# Altium PCB PCB.PcbDoc
Units mm, origin at the board's own origin, x right, y up, seen from the top; angles counter-clockwise.
Board outline 70 x 20.02 mm, 2 copper layers (Top Layer, Bottom Layer), stack 1.569 mm thick; 23 components, 16 nets, 70 pads, 25 vias.
Unrouted connection lines stored in the file: 1.
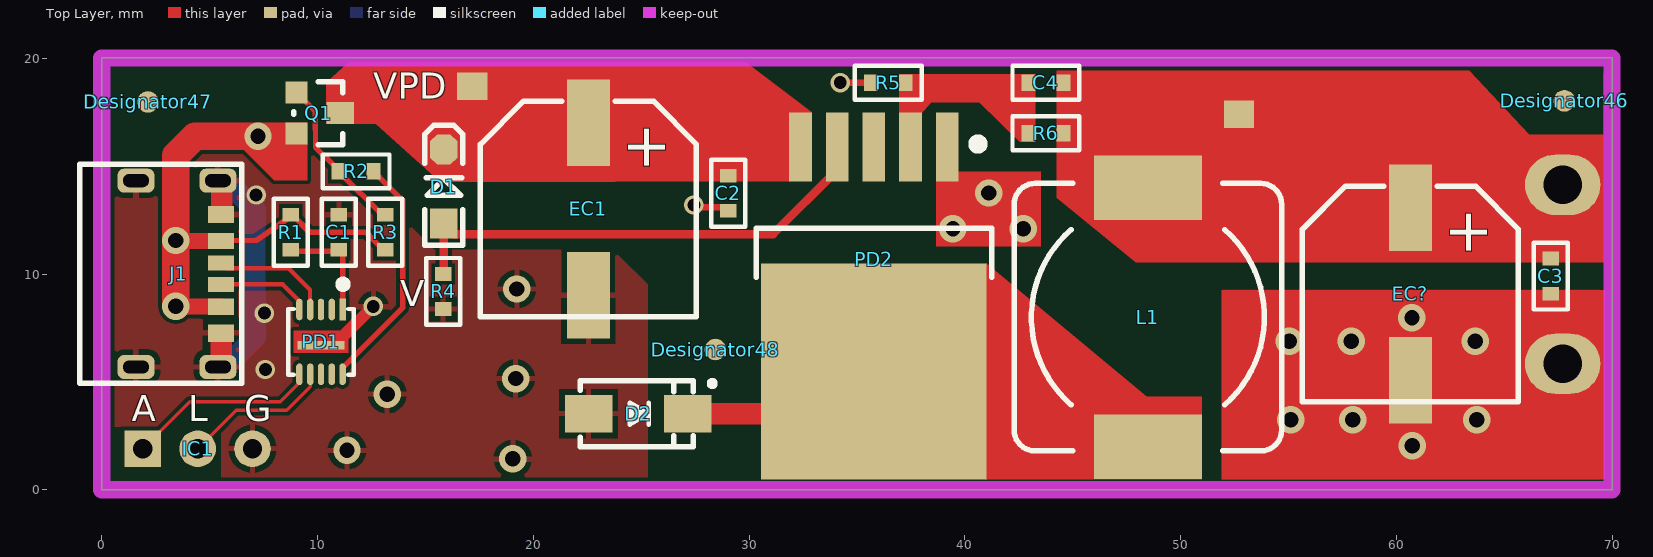
[diagram p0: Top Layer view]
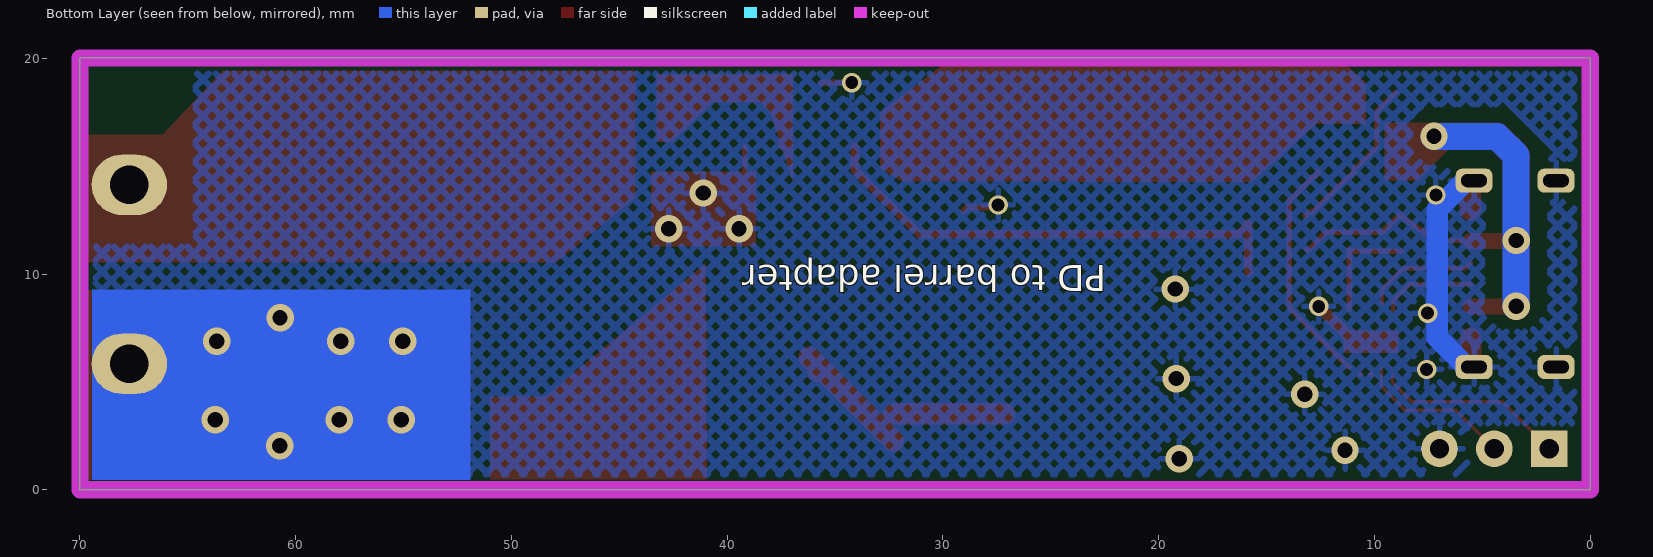
[diagram p1: Bottom Layer view, seen from below]
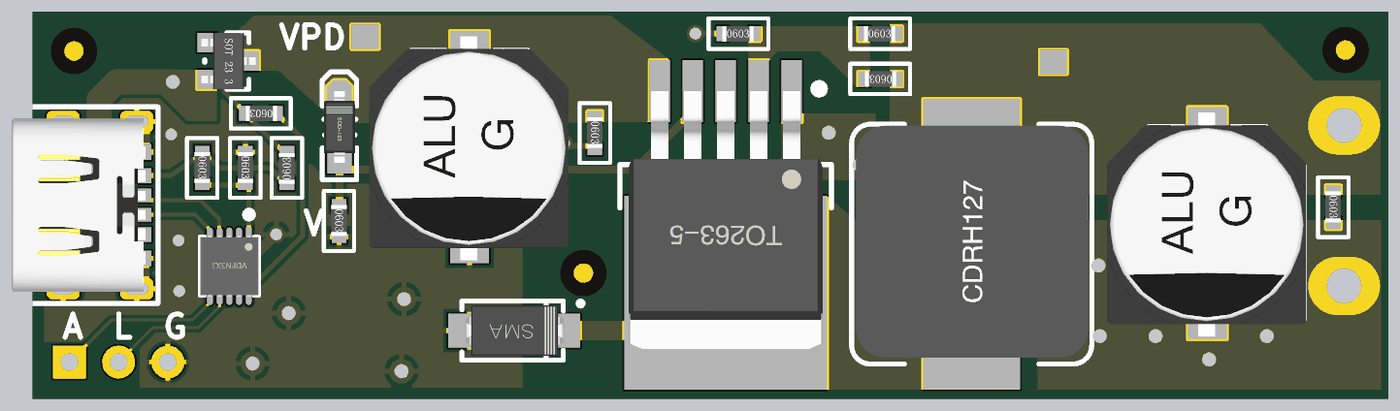
[diagram p2: 3D render of the assembled board from above, using the file's embedded part models]

## Layer stack, top to bottom
Top Solder: solder mask 0.0254, SM-001, Dk 4
Top Layer: signal copper 0.035
Dielectric 1: core 1.4986, Core-043, Dk 4.3
Bottom Layer: signal copper 0.035
Bottom Solder: solder mask 0.0254, SM-001, Dk 4

## Board outline
0,0 0,20.018 70,20.018 70,0

## Design rules (kind name [scope] priority, off if disabled: settings)
Clearance [All] p1: gap=0.18 ignorepadtopadclearanceinfootprint=TRUE // 符合嘉立创规则
ComponentClearance [All] p1: gap=0.254 collisioncheckmode=3 verticalgap=0.254 showdistances=TRUE donotcheckwithout3dbody=TRUE
DiffPairsRouting [OnLayer('Top Layer')] p1: maxlimit=0.254 minlimit=0.254 mostfreqgap=0.254 toplayer_minwidth=0.381 toplayer_maxwidth=0.381 toplayer_prefwidth=0.381 bottomlayer_minwidth=0.381 bottomlayer_maxwidth=0.381 bottomlayer_prefwidth=0.381 maxuncoupledlength=12.7
DiffPairsRouting DiffPairsRouting_1 [OnLayer('Bottom Layer')] p2: maxlimit=0.254 minlimit=0.254 mostfreqgap=0.254 toplayer_minwidth=0.381 toplayer_maxwidth=0.381 toplayer_prefwidth=0.381 bottomlayer_minwidth=0.381 bottomlayer_maxwidth=0.381 bottomlayer_prefwidth=0.381 maxuncoupledlength=12.7
PolygonConnect [All] p1: connectstyle=Relief reliefconductorwidth=0.254 reliefentries=4 polygonreliefangle="90 Angle" airgapwidth=0.254
RoutingTopology [All] p1: topology=Daisy_Balanced
RoutingVias [All] p1: holewidth=0.5 width=1.27 viastyle="Through Hole" minholewidth=0.3 minwidth=0.5 maxholewidth=2 maxwidth=5
SolderMaskExpansion [All] p1: expansion=0.102 istentingtop=FALSE
UnRoutedNet [All] p1: checkbadconnections=TRUE
Width [All] p1: maxlimit=5 minlimit=0.2 preferedwidth=0.254 checkconnectedcopper=TRUE // 符合嘉立创要求
26 further rules are at their usual default settings.

## Classes and differential pairs
component class Sheet: * C1 C2 C3 C4 D1 D2 EC? J1 L1 PD1 PD2 Q1 R1 R2 R3 R4 R5 R6

## Components (designator, comment, footprint, x,y, rotation, side; value= is the part's Value field where it differs from the comment)
C1 "104" 0603 10.986,11.938 r270 top
C2 "105/50V" 0603 29.032,13.741 r270 top
C3 "105/35V/50V" 0603 67.158,9.906 r270 top
C4 "2nF" 0603 43.764,18.872 r0 top
D1 "BZT52C16" SOD-123 15.85,14.059 r90 top
D2 "SS54" SMA/DO-214AC 24.867,3.531 r0 top
Designator46 "Comment" "Mark 1" 67.793,18.029 r0 top
Designator47 "Comment" "Mark 1" 2.139,17.978 r0 top
Designator48 "Comment" "Mark 1" 28.443,6.502 r0 top
EC1 "330uF/50V" SMD-EC10X10X10 22.555,9.017 r90 top
EC? "330uF/50V" SMD-EC10X10X10 60.655,5.08 r90 top
IC1 "Comment" "IIC_Port - duplicate" 3.175,1.905 r0 top
J1 "Type_C-6P" Type_C-6P -1,10 r0 top locked
L1 "330uH/5A" CDRH127 48.489,8.001 r90 top
PD1 "HUSB238" VDFN3X3-10L 10.16,6.858 r180 top locked
PD2 "XL4005" TO263-5A 35.787,15.9 r180 top
Q1 "AO3401" SOT23 9.001,18.539 r270 top
R1 "10Ω" 0603 8.763,11.938 r270 top
R2 "20K" 0603 11.786,14.757 r180 top
R3 "20K" 0603 13.132,11.938 r90 top
R4 "470Ω" 0603 15.824,9.195 r270 top
R5 "1K / 1%" 0603 36.449,18.872 r0 top
R6 "19.1K / 1%" 0603 43.764,16.535 r180 top

## Footprints (in the part's own frame and the unit in brackets; to place one, negate y for a bottom-side part, rotate by r counter-clockwise, add the part's x,y. Pads: shape width x height; smd on the part's side, far side on the other; paste and mask are expansions set on the pad)
0603 [mil]
  rect 25x30 smd: 1(-32,0) 2(32,0)
  silkscreen extent -61,-31 61,31, body extent -32,-16 31,16, height 18
CDRH127 [mm] "12*12*8mm（长宽高）"
  rect 3x5 smd: 1(-6,0) 2(6,0)
  silkscreen extent -6.2,-6.2 6.2,6.2, body extent -5.87,-6.03 6.13,5.97, height 7.8
"IIC_Port - duplicate" [mm] "iic配置端口"
  rect 1.7x1.7 hole 0.9: 1(-1.27,0)
  round 1.7 hole 0.9: 2(1.27,0) 3(3.81,0)
"Mark 1" [mm] "光学定位点，直径1mm"
  round 1 smd paste-1 mask+0.7: Mark(0,0)
SMA/DO-214AC [mm] "4.5x2.6*2.2mm（长宽高，不包括引脚）"
  rect 2.2x1.75 smd: 1(-2.3,0) 2(2.3,0)
  silkscreen extent -2.7,-1.52 3.56,1.52, body extent -2.53,-1.3 2.58,1.3, height 2.15
SMD-EC10X10X10 [mm]
  rect 4x2 smd: 1(8,0) 2(0,0)
  silkscreen extent -1,-5 9,5, body extent -1.86,-5.12 9.74,5.18, height 10.2
SOD-123 [mil] "2.7x1.6X1.1mm（长宽高，不包括引脚）"
  rect 55x50 smd: 1(-67.5,0)
  oct 55x50 smd: 2(67.5,0)
  silkscreen extent -108,-35 112,35, body extent -73,-31 73,31, height 48
SOT23 [mil]
  rect 40x40 smd: 1(4.88,0.63) 3(79.88,0.63)
  rect 40x50 smd: 2(41.88,80.63)
  silkscreen extent -15,-4 100,86, body extent -15,-11 99,99, height 47
TO263-5A [mm] "263，5脚晶体管"
  rect 1.05x3.2 smd: 1(-3.4,0) 2(-1.7,0) 3(0,0) 4(1.7,0) 5(3.4,0)
  rect 10.45x10 smd: 3(0,10.414)
  silkscreen extent -5.46,-0.33 5.46,6.04, body extent -5,-0.01 5,13.32, height 4.5
Type_C-6P [mm]
  rect 1.2x0.7 smd: A5(6.534,0.513) B5(6.534,-0.487)
  rect 1.2x0.76 smd: A9(6.534,-1.507) B9(6.534,1.533)
  rect 1.2x0.8 smd: A12(6.534,-2.737) B12(6.534,2.763)
  rrect50% 1.7x1.1 hole 0.6 slot 1.2 at 0 deg: ""(2.584,-4.307) ""(2.584,4.333) ""(6.384,-4.307) ""(6.384,4.333)
  silkscreen extent -0.01,-5.07 7.48,5.09, body extent -0.05,-4.46 6.85,4.48, height 3.18
VDFN3X3-10L [mm] "3mm*3mm*0.5mm(长*宽*脚距）"
  rect 0.3x1 smd: 1(-1,-1.5)
  oval 0.3x1 smd: 2(-0.5,-1.5) 3(0,-1.5) 4(0.5,-1.5) 5(1,-1.5) 6(1,1.5) 7(0.5,1.5) 8(0,1.5) 9(-0.5,1.5) 10(-1,1.5)
  rect 2.2x0.4 smd: 11(0,0.152)
  Top Layer region: -1.27,0.508 1.27,0.508 1.27,-0.508 -0.889,-0.508 -1.27,-0.127
  silkscreen extent -1.52,-2.77 1.52,1.52, body extent -1.5,-1.55 1.5,1.55, height 1.06

## Part data
C1 C2 C3 C4: library part C, "无极性贴片电容", BOM名称=无极性贴片电容, 学习资源=www.ooocke.com, 版权归属=源创客
D1: library part BZT52C, "稳压二极管", BOM名称=肖特基二极管, 学习资源=www.ooocke.com, 属性=40V/3A, 版权归属=源创客
D2: "肖特基二极管", BOM名称=整流二极管, 学习资源=www.ooocke.com, 版权归属=源创客
EC1 EC?: library part SMD_ECAP, "贴片电解电容"
L1: library part L-CD, "贴片功率电感", BOM名称=功率电感, 学习资源=www.ooocke.com, 版权归属=源创客
PD1: "The HUSB238 is compatible with PD3.0 and Type-C  / V1.4, and it can also support Apple Divider 3, BC1.2  / SDP, CDP and DCP while the source is attached."
PD2: "XL4005降压型DC-DC转换器(BUCK电路)，开关频率300kHz"
Q1: "P沟增强型场效应管", BOM名称=P沟场效应管, 学习资源=www.ooocke.com, 版权归属=源创客
R1 R2 R3 R4 R5 R6: library part R, "贴片电阻", BOM名称=贴片电阻, 学习资源=www.ooocke.com, 版权归属=源创客

## Free pads (board coordinates)
  rect 1.397x1.27 smd: 2(17.17,18.715) 2(52.71,17.414)
  oval 3.5x2.8 hole 1.8: 4(67.716,5.842) 4(67.716,14.138)

## Via types
v1: diameter 1.27, hole 0.711, Top Layer to Bottom Layer, tented both sides, 19 vias
v2: diameter 0.9, hole 0.6, Top Layer to Bottom Layer, tented both sides, 6 vias

## Nets (pads, with @x,y where several pads share a name; then routed paths per layer and width w, separated by ;. In a path a pad name is that pad's centre, name@x,y a point inside that pad or via, vN(x,y) a via of type N, cw(c..) or ccw(c..) an arc to the next point about the centre after c; other vN are vias at no path point)
16VOUT: C3.1 C4.2 EC?.1 L1.2 pad.2@52.71,17.414 pad.4@67.716,14.138 R6.1 | length 4.2
  Top Layer w0.254: C4.2@44.552,18.821 44.552,16.472 R6.1@44.742,16.281 ; L1.2@47.339,15.151 L1.2
ENCTL: D1.1 PD2.4 R4.1 | length 23
  Top Layer w0.4: R4.1@15.824,10.084 15.85,10.109 D1.1@15.85,12.287 ; D1.1 D1.1@15.85,12.287 ; PD2.4 34.087,14.825 31.113,11.852 16.285,11.852 D1.1@15.85,12.287
GND: C1.1 C2.2 C3.2 D2.1 EC1.2 EC?.2 IC1.3 J1. J1.A12 J1.B12 pad.4@67.716,5.842 PD1.11 PD2.1 R4.2 R5.1 | length 17.2
  Top Layer w0.2: R5.1@35.631,18.877 R5.1
  Top Layer w0.254: PD2.1@39.187,14.825 PD2.1
  Top Layer w0.3: v2(27.442,13.203) 27.557,13.088 28.873,13.088 C2.2 ; v2(34.229,18.877) R5.1@35.631,18.877
  Top Layer w1: J1.@5.384,5.693 5.484,5.693 5.534,5.743 J1.A12@5.534,7.031 ; J1.@5.384,14.333 5.559,14.158 J1.B12@5.559,12.984
  Bottom Layer w1: J1.@5.384,14.333 5.765,14.333 7.087,13.011 7.087,7.061 J1.@5.718,5.693
  other v1: 19.05,1.433 11.364,1.831 60.747,2.037 55.108,3.246 57.983,3.246 63.734,3.246 13.228,4.435 19.182,5.156 55.042,6.894 57.917,6.894 63.668,6.894 60.726,7.976 19.238,9.307 39.451,12.101 42.718,12.095 41.107,13.757
  other v2: 7.579,5.578 7.539,8.189 12.583,8.504 7.158,13.665
NetC1_2: C1.2 PD1.1 R1.2 | length 5.2
  Top Layer w0.254: R1.2@8.763,11.049 10.986,11.049 C1.2@11.16,11.049 ; PD1.1 C1.2@11.16,11.049 ; C1.2@11.16,11.151 C1.2@11.16,11.049
NetC4_1: C4.1 PD2.2 R5.2 R6.2 | length 11.9
  Top Layer w0.254: R5.2@37.186,18.847 37.262,18.847 R5.2 ; R5.2@37.44,18.847 R5.2@37.465,18.821 ; PD2.2@37.487,16.975 PD2.2 37.44,15.948 37.44,18.821 R5.2@37.465,18.821 ; R6.2@42.926,16.535 42.926,18.821 R5.2@37.465,18.821
NetD2_2: D2.2 L1.1 PD2.3 | length 10.9
  Top Layer w1: D2.2 PD2.3@32.283,3.531 ; PD2.3@32.309,2.261 PD2.3@35.787,5.739 ; PD2.3@35.787,5.486 PD2.3@35.787,5.739 ; PD2.3@36.195,6.147 PD2.3@35.787,5.739
NetIC1_1: IC1.1 PD1.6 | length 8.9
  Top Layer w0.15: IC1.1 4.087,4.087 8.278,4.087 9.16,4.969 PD1.6
NetIC1_2: IC1.2 PD1.7 | length 7.3
  Top Layer w0.15: IC1.2 6.223,3.683 8.565,3.683 9.668,4.786 PD1.7@9.668,5.637
NetJ1_A5: J1.A5 PD1.4 | length 5.3
  Top Layer w0.2: J1.A5 5.78,10.267 8.656,10.267 9.652,9.271 PD1.4@9.652,8.636
NetJ1_A9: J1.A9 J1.B9 Q1.3 R1.1 R3.1 | length 34.6
  Top Layer w0.254: J1.B9@6.01,11.54 7.152,11.558 8.751,12.666 R1.1@8.763,12.675 ; R1.1 8.826,12.751 9.639,11.938 12.255,11.938 13.068,11.125 R3.1
  Top Layer w0.75: v1@3.445,8.493 J1.A9 ; v1@3.453,11.533 J1.B9
  Top Layer w1.28: v1(3.429,8.509) v1(3.429,11.557) 3.429,15.494 4.318,16.383 v1(7.239,16.383)
  Bottom Layer w1.25: v1(3.429,8.509) v1(3.429,11.557) 3.429,15.494 4.318,16.383 v1(7.239,16.383)
NetJ1_B5: J1.B5 PD1.5 | length 4.4
  Top Layer w0.2: J1.B5 5.544,9.523 8.384,9.523 9.11,8.797 9.11,8.785 9.141,8.754 9.141,8.348 PD1.5@9.129,8.336
NetPD1_8: PD1.8 | length 0
  Top Layer w0.254: PD1.8 PD1.8@10.169,5.349
NetPD1_9: PD1.9 | length 0
  Top Layer w0.254: PD1.9 PD1.9@10.669,5.349
NetPD1_10: PD1.10 R2.1 | length 10.8
  Top Layer w0.254: PD1.10@11.16,5.696 11.181,5.717 11.231,5.717 13.945,8.43 13.945,13.411 12.852,14.503 12.789,14.503 12.598,14.694 R2.1
NetQ1_1: Q1.1 R2.2 R3.2 | length 7.7
  Top Layer w0.254: Q1.1 9.904,17.528 9.904,16.715 9.906,16.713 9.906,15.875 10.871,14.91 10.935,14.91 10.935,14.707 R2.2@10.96,14.707 ; R2.2 10.973,14.694 11.163,14.503 11.227,14.503 12.84,12.89 13.018,12.89 R3.2@13.208,12.7
PD_OUT: C2.1 D1.2 EC1.1 pad.2@17.17,18.715 PD2.5 Q1.2
pads on no net: Designator46.Mark Designator47.Mark Designator48.Mark PD1.2 PD1.3

## Polygon pours and split planes (outlines as drawn)
GND on Bottom Layer "GND_L02_P001" (hatched 45Degree grid 0.6 track 0.3, remove dead copper, pour order 1): 0,20.018 0,0 70,0 70,20.018
GND on Top Layer "GND_L01_P000" (solid, remove dead copper, pour order 0): 0,15.616 10.922,15.616 15.408,11.13 23.693,11.13 25.303,9.52 25.303,0 0,0

## Keep-outs
Keep-Out Layer:
  the board outline again, w0.8

## Other copper
Top Layer:
  rectangle net GND: 38.664,11.288 43.541,14.762
  region net 16VOUT: 44.263,13.538 47.918,10.556 69.606,10.556 69.606,19.279 69.606,16.454 66.172,16.454 63.373,19.421 44.263,19.421
  region net GND: 11.049,7.366 12.386,8.703 12.765,8.32 11.43,6.985
  pour cut-out: 0.457,2.921 0.467,2.931 5.537,2.931 5.537,0.589 5.359,0.411 0.432,0.411
  region net NetJ1_A9: 6.604,17.018 6.604,15.748 8.001,14.351 9.525,14.351 9.525,17.018
  region net GND: 51.904,9.241 69.632,9.241 69.632,0.488 51.904,0.488
  region net NetD2_2: 40.996,10.49 48.435,4.318 50.978,4.318 50.978,0.483 40.939,0.483
  region net NetC4_1: 36.957,14.3 36.957,19.253 43.256,19.253 43.256,16.154 43.231,16.129 42.548,16.129 40.668,17.958 38.456,17.958 37.97,17.412
  region net PD_OUT: 29.845,19.812 11.447,19.812 10.414,18.876 10.414,16.967 12.7,16.967 15.723,14.25 31.902,14.3 32.893,14.884 32.914,14.884 32.918,17.501
Bottom Layer:
  rectangle net GND: 51.892,0.462 69.454,9.276
  pour cut-out: 64.823,20.018 64.795,19.99 64.795,11.42 69.972,11.42 70,11.392 70,20.018
  pour cut-out: 0.457,2.921 0.467,2.931 5.537,2.931 5.537,0.589 5.359,0.411 0.432,0.411
  pour cut-out: 3.236,7.483 2.819,7.483 2.012,8.291 2.012,15.9 3.81,17.699 7.645,17.699 8.174,17.17 8.174,15.677 7.61,15.113 5.192,15.113 4.779,14.7 4.863,8.134 4.196,7.483

## Silkscreen, mask and mechanical layers (free items; w line width, h text height)
Top Overlay:
  text "VPD" at 12.578,18.115 h1.2
  text "V" at 13.843,8.509 h1.2
Bottom Overlay:
  text "PD to barrel adapter" at 22.423,10.41 h1.2 r180
Drill Drawing:
  text ".Legend" at 41.346,39.013 h1.2

## Dimensions
0,20.018 to 70,20.018 on Mechanical 13
0,20.018 to 0,0 on Mechanical 13

## Text inside footprints (layer, text, board x,y; h text height)
EC1: Top Overlay "+" at 24.409,17.005 h2 r270
EC?: Top Overlay "+" at 62.509,13.068 h2 r270
IC1: Top Overlay "G" at 6.604,3.175 h1.2; Top Overlay "L" at 4,3.175 h1.2; Top Overlay "A" at 1.397,3.175 h1.2